# EAGLE board rocketnet-daughter (EAGLE 6.4)

Size 18.8 x 6.6 mm. Coordinates in mm from the lower left corner, seen from the top.
Outline: 18.8,0 18.8,6.6 1,6.6 0,5.6 0,1 1,0 18.8,0
Copper layers (1*16): Top 0.035mm / dielectric 1.5mm / Bottom 0.035mm
Design rules "lpkf-s63-epl": minimum track width 10mil, minimum drill 0.35mm, track to track 8mil, track to pad 8mil, pad to pad 8mil, via to via 8mil, smd to smd 8mil, copper to edge 10mil, drill to drill 8mil, minimum pad ring 10mil, minimum via ring 8mil, stop-mask expansion 4mil, vias tented up to drill 0mil, thermal gap 10mil
Holes 2.44 mm at 17.2,3.3 1.6,3.3

## Footprints (pad centres in the part's own frame; a part is rotated, then mirrored left to right if it is on the bottom)
22AWG-WIRE = drill 0.9 pad 1.6: P$1 0,0
HARWIN-M50-31508-NO-HOLES = smd 0.71 x 1.65: 1 -4.445,-1.925; 2 -4.445,1.925; 3 -3.175,-1.925; 4 -3.175,1.925; 5 -1.905,-1.925; 6 -1.905,1.925; 7 -0.635,-1.925; 8 -0.635,1.925; 9 0.635,-1.925; 10 0.635,1.925; 11 1.905,-1.925; 12 1.905,1.925; 13 3.175,-1.925; 14 3.175,1.925; 15 4.445,-1.925; 16 4.445,1.925 | hole 0.71: 3.81,0; -3.81,0
26AWG-WIRE = drill 0.65: P$1 0,0

## Placement (x,y rotation side)
E$1  [22AWG-WIRE]  4.49,3.3 0 top
E$2  [HARWIN-M50-31508-NO-HOLES]  9.7,3.3 0 bottom
E$4  [22AWG-WIRE]  14.91,3.3 0 top
E$8  [26AWG-WIRE]  7.79,4.7 0 top
E$9  [26AWG-WIRE]  9.06,5.46 0 top
E$10  [26AWG-WIRE]  10.33,4.82 0 top
E$11  [26AWG-WIRE]  11.6,5.46 0 top
E$12  [26AWG-WIRE]  7.03,3.3 0 top
E$13  [26AWG-WIRE]  8.43,2.67 0 top
E$14  [26AWG-WIRE]  10.97,2.67 0 top
E$15  [26AWG-WIRE]  12.37,3.3 0 top

## Library data of the parts
E$1 E$2 E$4 E$8-E$15 = rocketnet-connector

## Nets
S$1: E$11.P$1
S$2: E$10.P$1
S$4: E$9.P$1
S$5: E$8.P$1

## Tracks (layer width: path | path; a pad name or v marks a point on that pad's centre or on a via)
(copper drawn outside any net)
  shapes: Bottom area x6, Top area x10

## Text on the board
Document: TOP VIEW (M50 on bottom of board) | B+ | AUX1 | AUX2 | AUX3 | AUX4 | B- | #2-56 nylock / (5/32" OD) | RX- | TX+ | RX+ | TX-